# EAGLE board JustABatterie (EAGLE 7.2.0)
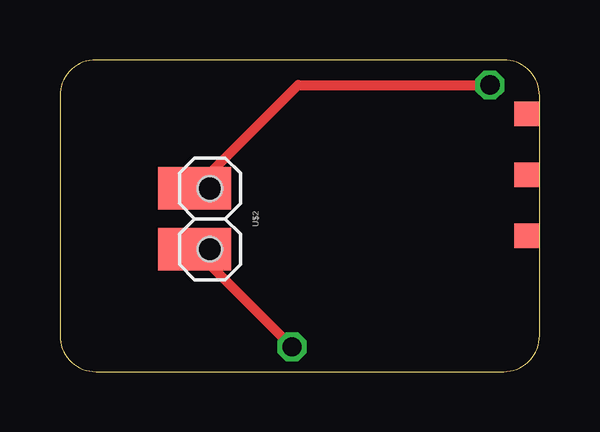
[diagram p0: board, top side]
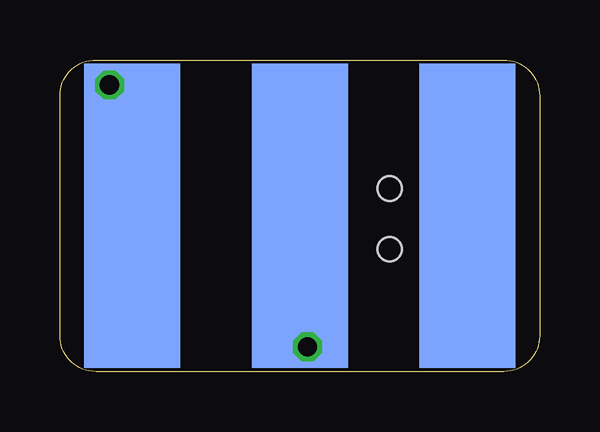
[diagram p1: board, bottom side, seen from below]

Size 20 x 13 mm. Coordinates in mm from the lower left corner, seen from the top.
Copper layers (1*16): Top 0.035mm / dielectric 1.5mm / Bottom 0.035mm
Design rules "Bilex DRU *": minimum track width 10mil, minimum drill 24mil, track to track 10mil, track to pad 10mil, pad to pad 10mil, via to via 10mil, smd to smd 10mil, copper to edge 1mil, drill to drill 8mil, minimum pad ring 10mil, minimum via ring 8mil, stop-mask expansion 4mil, vias tented up to drill 0mil, thermal gap 10mil

## Footprints (pad centres in the part's own frame; a part is rotated, then mirrored left to right if it is on the bottom)
CARRIER_SMD2_3POL = smd 4 x 12.7 bottom: GND -6.985,0; RX/TX 6.985,0; VCC 0,0 | smd 1.016 x 1.016: RST -9.461,0.826; TST -9.461,-1.714; VCC'' -9.461,-4.255
PINHD_2_MOD = smd 1.778 x 3.048: P$1 -1.27,-0.635; P$2 1.27,-0.635 | hole 1.016: -1.27,0; 1.27,0

## Placement (x,y rotation side)
U$1  CARRIER_SMD2SMD2_3POL  [CARRIER_SMD2_3POL]  10,6.5 180 top
U$2  PINHD_22.54MOD  [PINHD_2_MOD]  6.25,6.37 270 top

## Library data of the parts
U$1 U$2 = thar

## Nets
N$2: U$1.GND U$2.P$1
N$3: U$1.VCC U$2.P$2

## Tracks (layer width: path | path; a pad name or v marks a point on that pad's centre or on a via)
N$2  (via drill 0.8)
  Top 0.406: v17.93,11.96 9.93,11.96 U$2.P$1
  Bottom 0.254: U$1.GND 16.98,11.01 v17.93,11.96
  Bottom 0.406: v17.93,11.96 18,11.96 18,6.5
N$3  (via drill 0.8)
  Top 0.406: U$2.P$2 v9.68,1.04
  Bottom 0.254: U$1.VCC 10,1.36 v9.68,1.04